# Altium PCB DC-DC-converter-5A_test.PcbDoc
Units mil, origin at the board's own origin, x right, y up, seen from the top; angles counter-clockwise.
Board outline 1075 x 720 mil, 2 copper layers (Top Layer, Bottom Layer); 21 components, 11 nets, 49 pads, 44 vias.
Unrouted connection lines stored in the file: 31.
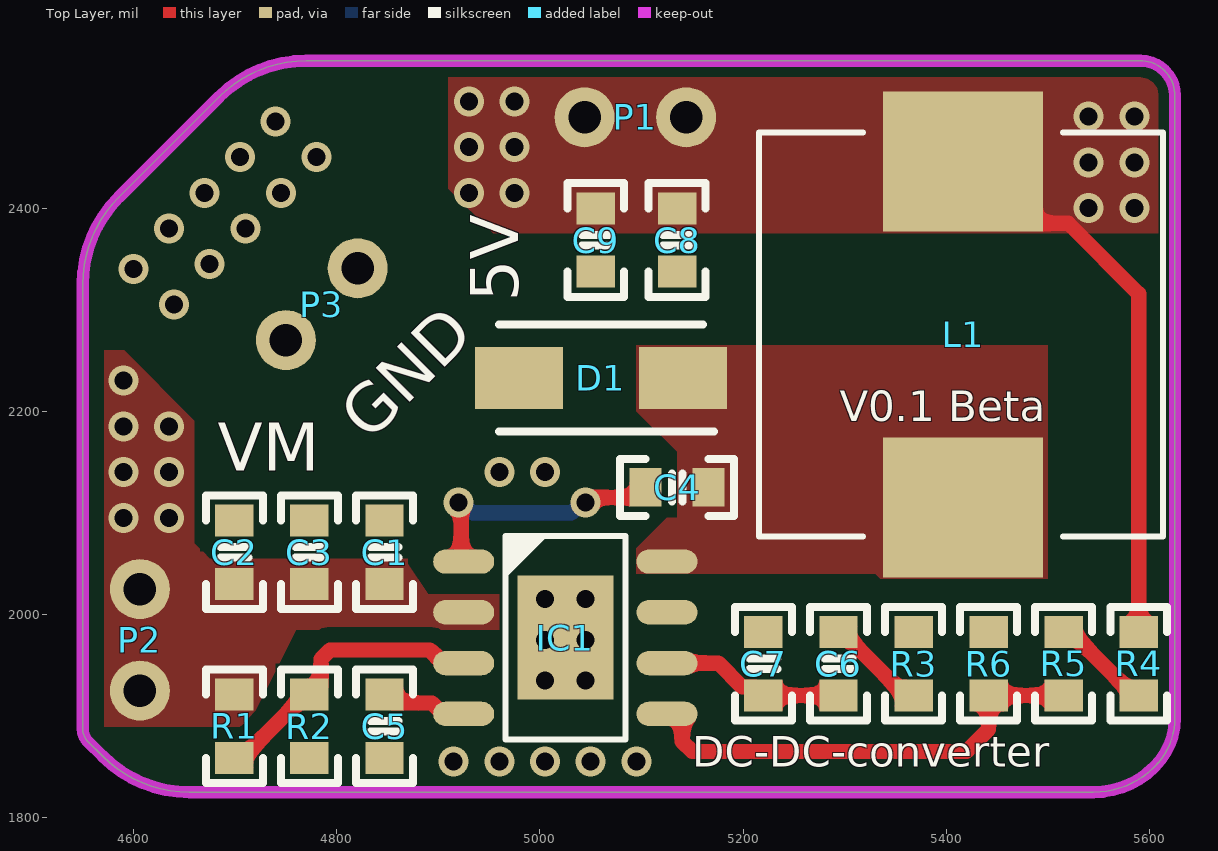
[diagram p0: Top Layer view]
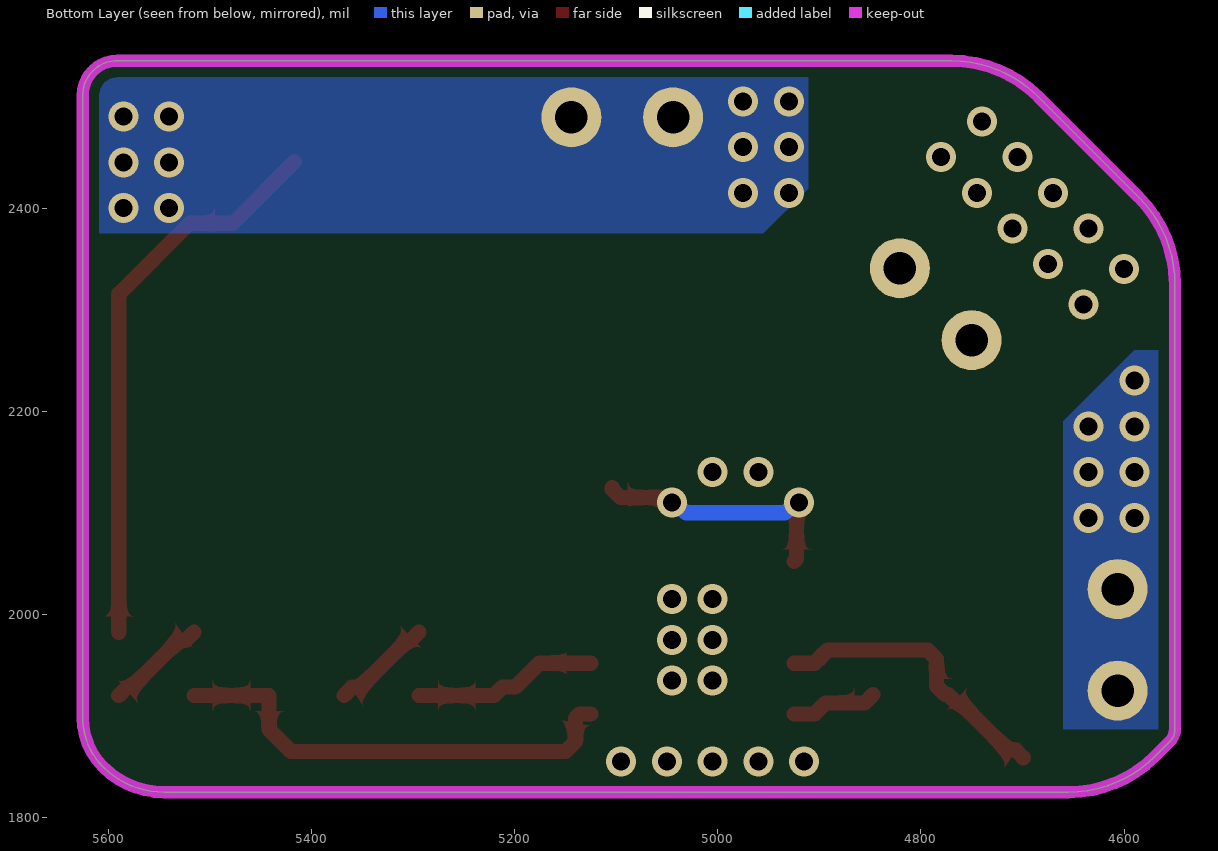
[diagram p1: Bottom Layer view, seen from below]
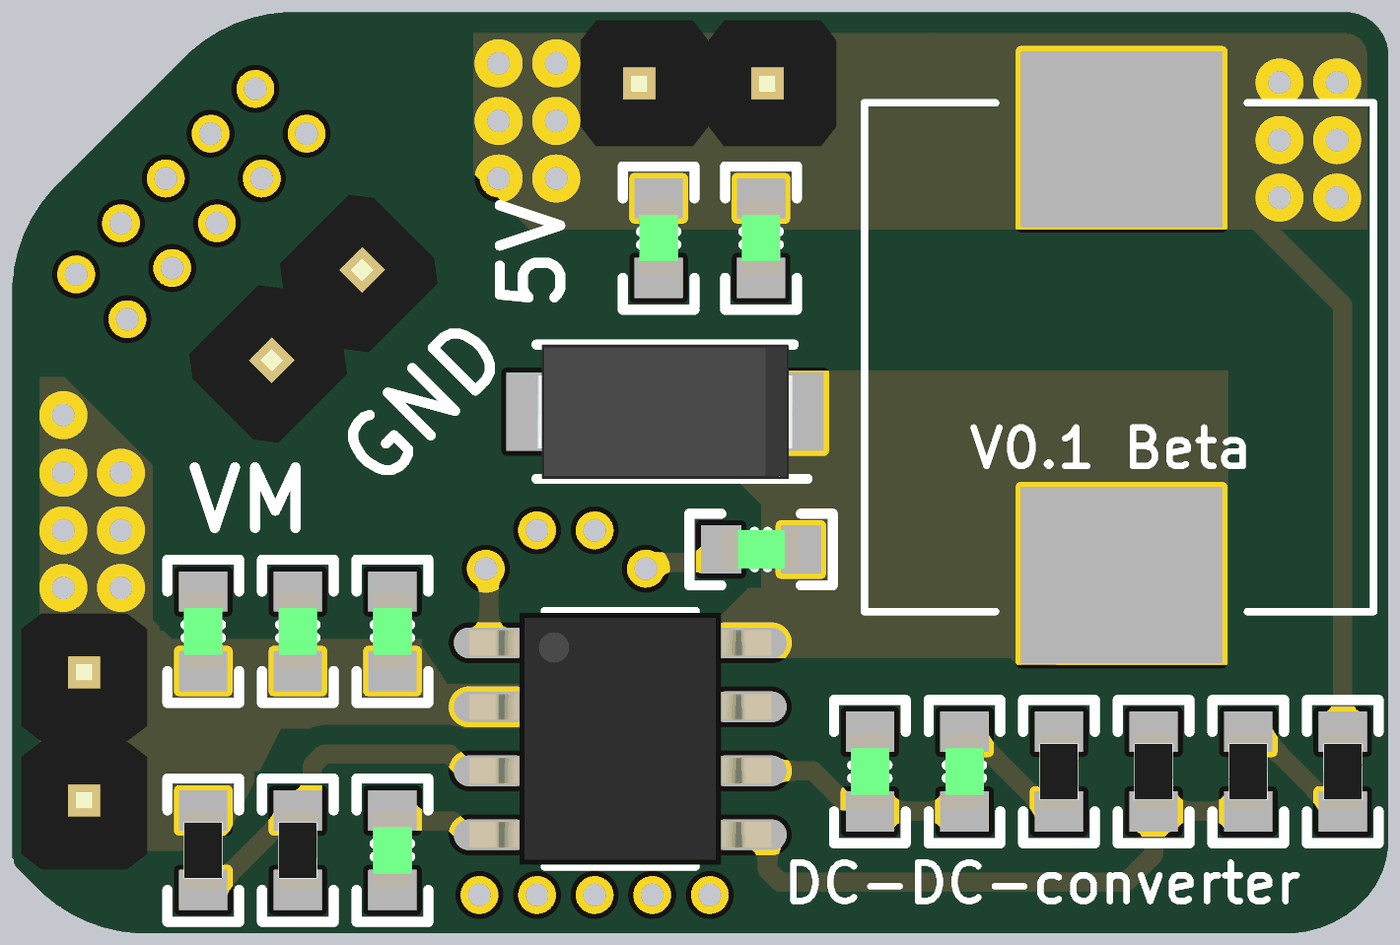
[diagram p2: 3D render of the assembled board from above, using the file's embedded part models]

## Layer stack, top to bottom
Top Solder: solder mask 0.4, Solder Resist, Dk 3.5
Top Layer: signal copper 1.4
Dielectric 1: dielectric 12.6, FR-4, Dk 4.8
Bottom Layer: signal copper 1.4
Bottom Solder: solder mask 0.4, Solder Resist, Dk 3.5

## Board outline
4555,1875 4569.64,1860.36 ccw(c4655,1945.71) 4655,1825 5544.64,1825 ccw(c5544.64,1910.36) 5605,1850 ccw(c5556.72,1898.28) 5625,1898.28 5625,2510.86 ccw(c5590.86,2510.86) 5615,2535 ccw(c5590.86,2510.86) 5590.86,2545 4770,2545 ccw(c4770,2424.29) 4684.64,2509.64 4585.36,2410.36 ccw(c4670.71,2325) 4550,2325 4550,1887.07 ccw(c4567.07,1887.07)

## Design rules (kind name [scope] priority, off if disabled: settings)
Clearance [All] p1: gap=15 ignorepadtopadclearanceinfootprint=FALSE except(10: Arc-Arc Arc-Track Arc-SMDPad Arc-THPad Arc-Via Arc-Text Arc-Hole Track-Track Track-SMDPad Track-THPad Track-Via Track-Text Track-Hole SMDPad-SMDPad SMDPad-THPad SMDPad-Via SMDPad-Text SMDPad-Hole THPad-THPad THPad-Via THPad-Text THPad-Hole Via-Via Via-Text Via-Hole Text-Text Text-Hole)
PlaneClearance [All] p1: clearance=40
PlaneConnect [All] p1: planeconnectstyle=Direct reliefexpansion=20 reliefentries=4 reliefconductorwidth=10 reliefairgap=10
PolygonConnect [All] p1: connectstyle=Direct reliefconductorwidth=10 reliefentries=4 polygonreliefangle="90 Angle" airgapwidth=10
RoutingVias [All] p1: holewidth=17.72 width=29.53 viastyle="Through Hole" minholewidth=17.72 minwidth=29.53 maxholewidth=17.72 maxwidth=29.53
SolderMaskExpansion [All] p1: expansion=4 istentingtop=FALSE
Width [All] p1: maxlimit=100 minlimit=15 preferedwidth=15
28 further rules are at their usual default settings.

## Classes and differential pairs
component class DC-DC-converter-5A_test: C2 C3 C4 C7 D1 IC1 L1 P1 P2 P3 R1 R2 R5 R6

## Components (designator, comment, footprint, x,y, rotation, side; value= is the part's Value field where it differs from the comment)
C1 "4.7uF" CAP-0603 4847.05,2061.1 r270 top
C2 "4.7uF" CAP-0603 4699.28,2061.1 r270 top
C3 "10nF" CAP-0603 4773.17,2061.1 r270 top
C4 "100nF" CAP-0603 5135,2125 r0 top
C5 "10nF" CAP-0603 4847.05,1890 r90 top
C6 "2200pF" CAP-0603 5293.88,1951.42 r270 top
C7 "22pF" CAP-0603 5220,1951.42 r270 top
C8 "47uF" CAP-0603 5135,2368.39 r90 top
C9 "47uF" CAP-0603 5055,2368.39 r90 top
D1 "B340A" DO-214AC_SMA 5060.09,2232.7 r180 top
IC1 "TPS54531DDA" SOIC_8_PAD 5025,1977.05 r270 top
L1 "4.7uH 5A" L-10040 5416.56,2275.31 r90 top
P1 "HDR1x2_2.54" HDR1X2_2.54_180 5043.94,2489.34 r90 top
P2 "HDR1x2_2.54" HDR1X2_2.54_180 4606.34,2025 r0 top
P3 "HDR1x2_2.54" HDR1X2_2.54_180 4820.71,2340.71 r315 top
R1 "665k" R-0603 4699.28,1890 r90 top
R2 "130k" R-0603 4773.17,1890 r90 top
R3 "37.4k" R-0603 5367.77,1951.42 r270 top
R4 "51.1R" R-0603 5589.42,1951.42 r90 top
R5 "10.2k" R-0603 5515.54,1951.42 r90 top
R6 "1.96k" R-0603 5441.65,1951.42 r270 top

## Footprints (in the part's own frame and the unit in brackets; to place one, negate y for a bottom-side part, rotate by r counter-clockwise, add the part's x,y. Pads: shape width x height; smd on the part's side, far side on the other; paste and mask are expansions set on the pad)
CAP-0603 [mm]
  rect 0.8x0.96 smd: 1(-0.79,0) 2(0.79,0)
  silkscreen extent -1.42,-0.71 1.42,0.71, body extent -0.76,-0.39 0.76,0.39, height 0.9
DO-214AC_SMA [mm]
  rect 2.2x1.55 smd: 1(2.05,0) 2(-2.05,0)
  silkscreen extent -2.83,-1.33 2.55,1.33, body extent -2.55,-1.33 2.55,1.33, height 2.29
HDR1X2_2.54_180 [mm]
  round 1.5 hole 0.813: 1(0,0) 2(0,-2.54)
  body extent -1.25,-3.81 1.25,1.27, height 8.2
L-10040 [mm] "10.1*11.6*4.0MM(长*宽*高)"
  rect 3.5x4 smd: 1(-4.326,0) 2(4.326,0)
  silkscreen extent -5.05,-5 5.05,5.1, body extent -5,-5 5,5.08, height 4
R-0603 [mm]
  rect 0.8x0.96 smd: 1(-0.79,0) 2(0.79,0)
  silkscreen extent -1.42,-0.71 1.42,0.71, body extent -0.76,-0.38 0.76,0.38, height 0.41
SOIC_8_PAD [mil]
  oval 24x60 smd: 1(-75,-100) 2(-25,-100) 3(25,-100) 4(75,-100) 5(75,100) 6(25,100) 7(-25,100) 8(-75,100)
  rect 122.05x94.49 smd: 9(0,0)
  silkscreen extent -100,-59 100,59, body extent -98,-118 98,118, height 71

## Part data
C1 C2 C3 C4 C5 C6 C7 C8 C9: library part CAP, "贴片电容", Package=0402, SuppliersPartNumber=C52923, ComponentLink1Description=供应商链接, ComponentLink1URL=http://www.szlcsc.com/product/details_53938.html, Supplier=LC
D1: library part DIODE, "肖特基二极管", Package=SMA(DO-214AC), SuppliersPartNumber=C22452, ComponentLink1Description=供应商链接, ComponentLink1URL=http://www.szlcsc.com/product/details_23178.html, Supplier=LC
IC1: "集成稳压芯片", Manufacturer_Name="Texas Instruments", Mouser Part Number=595-TPS54531DDA, Arrow Part Number=TPS54531DDA, Arrow Price/Stock=https://www.arrow.com/en/products/tps54531dda/texas-instruments, Datasheet Link=http://www.ti.com/lit/gpn/tps54531, Height=1.7mm, Manufacturer_Part_Number=TPS54531DDA, Mouser Price/Stock=https://www.mouser.co.uk/ProductDetail/Texas-Instruments/TPS54531DDA?qs=jA5Ki6243omoJVKISZs%2FBg%3D%3D
L1: library part INDUCTOR, "电感", Package=0402, SuppliersPartNumber=C32041, ComponentLink1Description=供应商链接, ComponentLink1URL=http://www.szlcsc.com/product/details_33003.html, Supplier=LC
P1 P2 P3: "Header"
R1 R2 R3 R4 R5 R6: library part RES, "贴片电阻", Package=0805, SuppliersPartNumber=C17798, Supplier=LC

## Via types
v1: diameter 29.53, hole 17.72, Top Layer to Bottom Layer, 44 vias

## Nets (pads, with @x,y where several pads share a name; then routed paths per layer and width w, separated by ;. In a path a pad name is that pad's centre, name@x,y a point inside that pad or via, vN(x,y) a via of type N, cw(c..) or ccw(c..) an arc to the next point about the centre after c; other vN are vias at no path point)
5V: C8.2 C9.2 L1.2 P1.1 P1.2 R4.2 | length 559.8
  Top Layer w15: L1.2 5477.19,2385 5520,2385 5589.42,2315.58 R4.2
  other v1: 5540,2400 5585,2400 4930,2415 4975,2415 5540,2445 5585,2445 4930,2460 4975,2460 5540,2490 5585,2490 4930,2505 4975,2505
GND: C1.1 C2.1 C3.1 C5.1 C7.1 C8.1 C9.1 D1.1 IC1.7 IC1.9 P3.1 P3.2 R2.1 R3.1 R6.1
  other v1: 4915,1855 4960,1855 5005,1855 5050,1855 5095,1855 5005,1935 5045,1935 5005,1975 5045,1975 5005,2015 5045,2015 4960,2140 5005,2140 4640,2305 4600,2340 4675,2345 4635,2380 4710,2380 4670,2415 4745,2415 4705,2450 4780,2450 4740,2485
NetC4_1: C4.1 IC1.1 | length 259.4
  Top Layer w15: v1(4920,2110) 4922.5,2107.5 4922.5,2054.55 IC1.1 ; v1(5045,2110) 5048.93,2110 5053.93,2115 5095.65,2115 5103.9,2123.25 C4.1
  Bottom Layer w15: v1(4920,2110) 4923.93,2110 4933.93,2100 5031.07,2100 5041.07,2110 v1(5045,2110)
NetC4_2: C4.2 D1.2 IC1.8 L1.1
NetC5_2: C5.2 IC1.4 | length 85.8
  Top Layer w15: C5.2 4855.3,1912.85 4893.76,1912.85 4904.56,1902.05 IC1.4
NetC6_1: C6.1 R3.2 | length 99.7
  Top Layer w15: C6.1 5302.13,1974.27 5305.73,1974.27 5351.44,1928.56 5359.52,1928.56 R3.2
NetC6_2: C6.2 C7.2 IC1.6 | length 182
  Top Layer w15: IC1.6 5175.6,1952.05 5199.1,1928.56 5211.75,1928.56 C7.2 C6.2
NetIC1_3: IC1.3 R1.1 R2.2 | length 290.8
  Top Layer w15: R1.1 4707.53,1867.15 4715.15,1867.15 4760.85,1912.85 4764.92,1912.85 R2.2 4776.32,1921.1 4784.57,1929.35 4784.57,1956.21 4793.35,1965 4891.62,1965 4904.56,1952.05 IC1.3
NetIC1_5: IC1.5 R5.1 R6.2 | length 461.9
  Top Layer w15: IC1.5 5135.84,1902.05 5140,1897.9 5140,1875 5150,1865 5420,1865 5441.65,1886.65 R6.2 R5.1
NetR4_1: R4.1 R5.2 | length 99.7
  Top Layer w15: R5.2 5523.78,1974.27 5530.73,1974.27 5576.44,1928.56 5581.17,1928.56 R4.1
VM: C1.2 C2.2 C3.2 IC1.2 P2.1 P2.2 R1.2
  other v1: 4590,2095 4635,2095 4590,2140 4635,2140 4590,2185 4635,2185 4590,2230

## Polygon pours and split planes (outlines as drawn)
GND on Top Layer "GND_L01_P007" (solid, remove dead copper, pour order 7): 4658.42,3751.77 4658.42,2726.77 6068.42,2726.77 6068.42,3751.77
5V on Top Layer "5V_L01_P003" (solid, remove dead copper, pour order 3): 4910,2545 4910,2419.14 4954.14,2375 5625,2375 5625,2545 5182.93,2545
VM on Top Layer "VM_L01_P002" (solid, pour order 2): 4660,2070 4675,2055 4660,2055
VM on Top Layer "VM_L01_P001" (solid, remove dead copper, pour order 1): 4550,2260 4590.86,2260 4660,2190.86 4660,2055 4870,2055 4870,2050 4890,2020 4960,2020 4960,1985 4760,1985 4720,1905 4704.81,1889.47 4550,1889.47
NetC4_2 on Top Layer "NETC4_2_L01_P000" (solid, pour order 0): 5095,2040 5330,2040 5335,2035 5500,2035 5500,2265 5095,2265 5095,2200 5135,2160 5135,2095 5125,2095 5095,2065
GND on Bottom Layer "GND_L02_P006" (solid, remove dead copper, pour order 6): 4685,3725 4685,2780 6040,2780 6040,3725
VM on Bottom Layer "VM_L02_P005" (solid, pour order 5): 4660,1887.07 4660,2190 4590,2260 4565,2260 4565,1887.07
5V on Bottom Layer "5V_L02_P004" (solid, remove dead copper, pour order 4): 4910.86,2545 4910.86,2419.14 4955,2375 5625.86,2375 5625.86,2545 5183.79,2545

## Keep-outs
Keep-Out Layer:
  lines w12: 4550,1887.07 ccw(c4567.07,1887.07) 4555,1875 4569.64,1860.36 ccw(c4655,1945.71) 4655,1825 4880,1825 5070.5,1825 5085.5,1825 5505,1825 5544.64,1825 ccw(c5544.64,1910.36) 5605,1850 ccw(c5556.72,1898.28) 5625,1898.28 5625,1902.07 5625,2507.93 5625,2510.86 ccw(c5590.86,2510.86) 5615,2535 ccw(c5590.86,2510.86) 5590.86,2545 5182.93,2545 4890,2545 4770,2545 ccw(c4770,2424.29) 4684.64,2509.64 4585.36,2410.36 ccw(c4670.71,2325) 4550,2325 4550,2065 4550,1887.07

## Silkscreen, mask and mechanical layers (free items; w line width, h text height)
Top Overlay:
  text "5V" at 4978.61,2307.87 h47.24 r90
  text "V0.1 Beta" at 5295,2190 h30
  text "GND" at 4832.27,2168.87 h47.24 r45
  text "VM" at 4682.87,2141.39 h47.24
  text "DC-DC-converter" at 5150,1850 h30